# Altium PCB shkb_lite.PcbDoc (part 1 of 2)
Units mm, origin at the board's own origin, x right, y up, seen from the top; angles counter-clockwise.
Board outline 141.5 x 36 mm, 2 copper layers (Top Layer, Bottom Layer), stack 1.57 mm thick; 74 components, 53 nets, 368 pads, 293 vias.
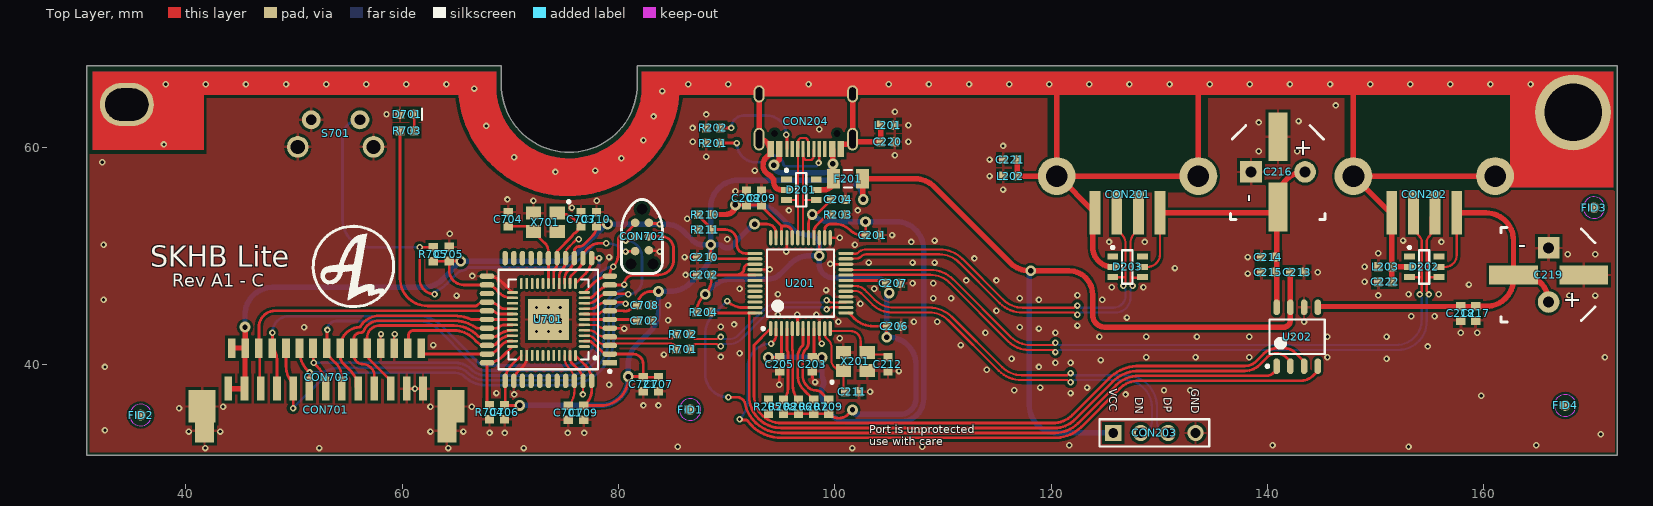
[diagram p0: Top Layer view]
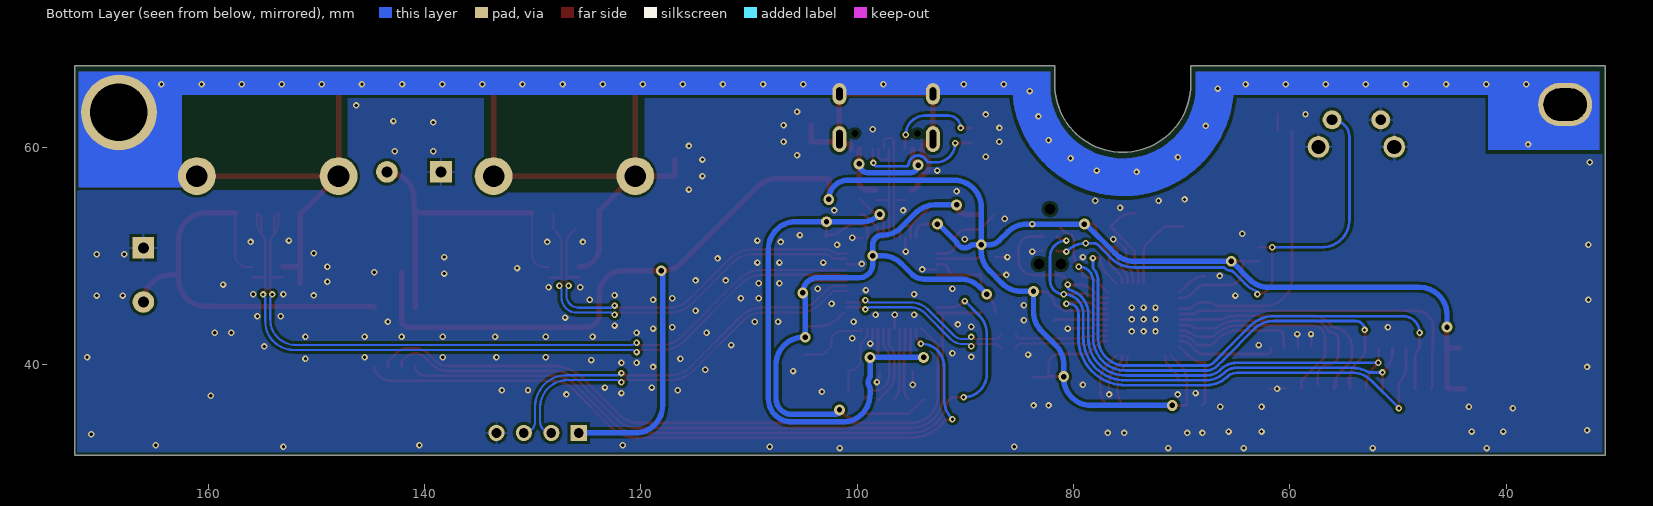
[diagram p1: Bottom Layer view, seen from below]

## Layer stack, top to bottom
Top Solder: solder mask 0.0102, Solder Resist, Dk 3.5
Top Layer: signal copper 0.0356
Dielectric 1: core 1.4986, Core-043, Dk 4.3
Bottom Layer: signal copper 0.0356
Bottom Solder: solder mask 0.0102, Solder Resist, Dk 3.5

## Board outline
30.843,31.602 30.843,67.602 69.143,67.602 69.143,65.902 ccw(c75.443,65.902) 75.443,59.602 ccw(c75.443,65.902) 81.743,65.902 81.743,67.602 172.344,67.602 172.344,31.602

## Design rules (kind name [scope] priority, off if disabled: settings)
BoardOutlineClearance [All] p1: gap=0.254 ignorepadtopadclearanceinfootprint=FALSE except(0: Arc-SplitContinuation Track-SplitContinuation SMDPad-SplitContinuation THPad-SplitContinuation Via-SplitContinuation Fill-SplitContinuation Poly-SplitContinuation Region-SplitContinuation Text-SplitContinuation)
Clearance [All] p1: gap=0.254 ignorepadtopadclearanceinfootprint=FALSE except(0: Arc-Hole Track-Hole SMDPad-Hole THPad-Hole Via-Hole Fill-Hole Poly-Hole Region-Hole Text-Hole; 0.2: Arc-Arc Arc-Track Arc-SMDPad Track-Track Track-SMDPad SMDPad-SMDPad)
DiffPairsRouting [All] p1: maxlimit=0.254 minlimit=0.254 mostfreqgap=0.254 toplayer_minwidth=0.2 toplayer_maxwidth=0.381 toplayer_prefwidth=0.381 bottomlayer_minwidth=0.2 bottomlayer_maxwidth=0.381 bottomlayer_prefwidth=0.381 maxuncoupledlength=12.7
PlaneConnect [All] p1: pad.planeconnectstyle=Relief pad.reliefexpansion=0.508 pad.reliefentries=4 pad.reliefconductorwidth=0.254 pad.reliefairgap=0.254 via.planeconnectstyle=Direct via.reliefexpansion=0.508 via.reliefentries=4 via.reliefconductorwidth=0.254 via.reliefairgap=0.254
PolygonConnect [All] p1: connectstyle=Relief reliefconductorwidth=0.254 reliefentries=4 polygonreliefangle="90 Angle" airgapwidth=0.254
RoutingVias [All] p1: holewidth=0.711 width=1.27 viastyle="Through Hole" minholewidth=0.3 minwidth=0.6 maxholewidth=0.711 maxwidth=1.27
SolderMaskExpansion [All] p1: expansion=0.102 istentingtop=FALSE
Width [All] p1: maxlimit=0.5 minlimit=0.2 preferedwidth=0.254
28 further rules are at their usual default settings.

## Classes and differential pairs
component class Designator: C201 C202 C203 C204 C205 C206 C207 C208 C209 C210 C211 C212 C213 C214 C215 C216 C217 C218 C219 C220 C221 C222 CON201 CON202 CON203 CON204 D201 D202 D203 F201 FID1 FID2 FID3 FID4 L201 L202 L203 R201 R202 R203 R204 R205 R206 R207 R208 R209 R210 R211 U201 U202 X201
differential pair D4: +D4_P -D4_N
differential pair D3: +D3_P -D3_N
differential pair D2: +D2_P -D2_N
differential pair D1: +D1_P -D1_N
differential pair D: +D_P -D_N
differential pair MCU_D_PRE: +MCU_D_PRE_P -MCU_D_PRE_N

## Components (designator, comment, footprint, x,y, rotation, side; value= is the part's Value field where it differs from the comment)
C201 "" C0603[1608] 103.505,51.943 r180 top value=10uF
C202 "" C0603[1608] 87.925,48.26 r0 top value=10uF
C203 "" C0603[1608] 97.917,40.005 r90 top value=0.1uF
C204 "" C0603[1608] 100.33,55.245 r180 top value=0.1uF
C205 "" C0603[1608] 94.91,40.005 r90 top value=0.1uF
C206 "" C0603[1608] 105.48,43.517 r180 top value=0.1uF
C207 "" C0603[1608] 105.41,47.498 r180 top value=0.1uF
C208 "" C0603[1608] 91.821,55.372 r270 top value=0.1uF
C209 "" C0603[1608] 93.218,55.372 r270 top value=0.1uF
C210 "" C0603[1608] 87.925,49.911 r0 top value=1uF
C211 "" C0603[1608] 101.6,37.465 r180 top value=30pF
C212 "" C0603[1608] 104.902,40.005 r90 top value=30pF
C213 "" C0603[1608] 142.748,48.514 r180 top value=0.1uF
C214 "" C0603[1608] 140.081,49.911 r0 top value=0.1uF
C215 "" C0603[1608] 140.081,48.514 r0 top value=10uF
C216 "" "C_9L_9M + THT" 140.97,57.785 r270 top value=120-150uF
C217 "" C0603[1608] 159.258,44.704 r90 top value=0.1uF
C218 "" C0603[1608] 157.861,44.704 r90 top value=10uF
C219 "" "C_9L_9M + THT" 165.989,48.26 r180 top value=120-150uF
C220 "" C0603[1608] 104.902,60.579 r180 top value=0.1uF
C221 "" C0603[1608] 116.205,58.928 r0 top value=0.1uF
C222 "" C0603[1608] 150.876,47.625 r0 top value=0.1uF
C701 "" C0603[1608] 75.357,35.53 r270 top value=0.1uF
C702 "" C0603[1608] 82.405,44.048 r0 top value=1uF
C703 "" C0603[1608] 76.538,53.421 r270 top value=18pF
C704 "" C0603[1608] 69.807,53.421 r270 top value=18pF
C705 "" C0603[1608] 64.346,50.195 r270 top value=0.1uF
C706 "" C0603[1608] 69.469,35.56 r90 top value=0.1uF
C707 "" C0603[1608] 83.701,38.156 r90 top value=0.1uF
C708 "" C0603[1608] 82.405,45.471 r180 top value=0.1uF
C709 "" C0603[1608] 76.792,35.53 r90 top value=1uF
C710 "" C0603[1608] 77.96,53.421 r270 top value=0.1uF
C721 "" C0603[1608] 82.278,38.156 r90 top value=0.1uF
CON201 "Generic USB-A 2.0" "JING 903-231A2031S10100" 127.058,57.4 r180 top locked
CON202 "Generic USB-A 2.0" "JING 903-231A2031S10100" 154.493,57.4 r180 top locked
CON203 "Header 4" HDR1X4 125.73,33.655 r0 top
CON204 "TYPE-C-31-M-12" TYPE-C-31-M-12 97.315,59.9 r180 top
CON701 "HHKB-board connector" "JST S13B-ZR-SM4A-TF(LF)(SN)" 61.922,37.749 r180 top locked
CON702 "TC2030-IDC" TC2030-IDC-NL 82.169,51.816 r270 top
CON703 "HHKB-board connector JP" DF14A-15P-1.25H 53.005,36.102 r180 top locked
D201 "SRV05" SOT-23-6 96.901,56.134 r0 top
D202 "SRV05" SOT-23-6 154.493,49 r0 top
D203 "SRV05" SOT-23-6 127.058,49 r0 top
D701 "LED1" LED0603[1608] 60.452,63.119 r0 top
F201 "Fuse Thermal" C1206[3216] 101.219,57.15 r180 top
FID1 "Plug" Fiducial_Nordic 86.614,35.814 r90 top
FID2 "Plug" Fiducial_Nordic 35.814,35.306 r90 top
FID3 "Plug" Fiducial_Nordic 170.18,54.483 r90 top
FID4 "Plug" Fiducial_Nordic 167.513,36.195 r90 top
L201 "Inductor" L0603[1608] 104.902,62.103 r180 top value="220 @ 100MHz, 2A"
L202 "Inductor" L0603[1608] 116.205,57.404 r0 top value="220 @ 100MHz, 2A"
L203 "Inductor" L0603[1608] 150.876,49.022 r0 top value="220 @ 100MHz, 2A"
R201 "Res1" R0603[1608] 88.75,60.452 r180 top value=5k1
R202 "Res1" R0603[1608] 88.75,61.849 r180 top value=5k1
R203 "" R0603[1608] 100.33,53.848 r180 top value=2.7k
R204 "" R0603[1608] 87.884,44.831 r180 top value=10k
R205 "" R0603[1608] 93.853,36.068 r90 top value=10k
R206 "" R0603[1608] 96.647,36.068 r270 top value=10k
R207 "" R0603[1608] 98.044,36.068 r270 top value=10k
R208 "" R0603[1608] 95.25,36.068 r270 top value=10k
R209 "" R0603[1608] 99.441,36.068 r270 top value=10k
R210 "" R0603[1608] 88.011,53.848 r180 top value=DNM
R211 "" R0603[1608] 88.011,52.451 r0 top value=DNM
R701 "" R0603[1608] 85.979,41.402 r180 top value=22R
R702 "" R0603[1608] 85.979,42.799 r180 top value=22R
R703 "" R0603[1608] 60.452,61.595 r0 top value=1K
R704 "" R0603[1608] 68.072,35.56 r90 top value=10K
R705 "" R0603[1608] 62.873,50.17 r270 top value=10K
S701 "SW-PB" "WURTH 431256038736" 53.843,62.602 r180 top locked
U201 "FE1.1" "FE1.1 LQFP48" 96.815,47.498 r90 top
U202 "MIC2026-2" SOIC-8 142.748,42.545 r90 top
U701 "ATMEGA32U4" ATMEGA32U4-COMBO 73.515,44.142 r180 top locked
X201 "XTAL" XTAL-3225 101.895,40.259 r0 top value=12MHz
X701 "XTAL" XTAL-3225 73.236,53.116 r180 top

## Footprints (in the part's own frame and the unit in brackets; to place one, negate y for a bottom-side part, rotate by r counter-clockwise, add the part's x,y. Pads: shape width x height; smd on the part's side, far side on the other; paste and mask are expansions set on the pad)
ATMEGA32U4-COMBO [mm] "QFP, 44-Leads, Body 9,95x9,95mm, Pitch 0,80mm, IPC Medium Density"
  rect 1.35x0.5 smd: 1(-5.675,4)
  oval 1.05x0.25 smd: 1(-3.325,2.5) 2(-3.325,2) 3(-3.325,1.5) 4(-3.325,1) 5(-3.325,0.5) 6(-3.325,0) 7(-3.325,-0.5) 8(-3.325,-1) 9(-3.325,-1.5) 10(-3.325,-2) 11(-3.325,-2.5) 23(3.325,-2.5) 24(3.325,-2) 25(3.325,-1.5) 26(3.325,-1) 27(3.325,-0.5) 28(3.325,0) 29(3.325,0.5) 30(3.325,1) 31(3.325,1.5) 32(3.325,2) 33(3.325,2.5)
  oval 1.35x0.5 smd: 2(-5.675,3.2) 3(-5.675,2.4) 4(-5.675,1.6) 5(-5.675,0.8) 6(-5.675,0) 7(-5.675,-0.8) 8(-5.675,-1.6) 9(-5.675,-2.4) 10(-5.675,-3.2) 11(-5.675,-4) 23(5.675,-4) 24(5.675,-3.2) 25(5.675,-2.4) 26(5.675,-1.6) 27(5.675,-0.8) 28(5.675,0) 29(5.675,0.8) 30(5.675,1.6) 31(5.675,2.4) 32(5.675,3.2) 33(5.675,4)
  oval 0.5x1.35 smd: 12(-4,-5.675) 13(-3.2,-5.675) 14(-2.4,-5.675) 15(-1.6,-5.675) 16(-0.8,-5.675) 17(0,-5.675) 18(0.8,-5.675) 19(1.6,-5.675) 20(2.4,-5.675) 21(3.2,-5.675) 22(4,-5.675) 34(4,5.675) 35(3.2,5.675) 36(2.4,5.675) 37(1.6,5.675) 38(0.8,5.675) 39(0,5.675) 40(-0.8,5.675) 41(-1.6,5.675) 42(-2.4,5.675) 43(-3.2,5.675) 44(-4,5.675)
  oval 0.25x1.05 smd: 12(-2.5,-3.325) 13(-2,-3.325) 14(-1.5,-3.325) 15(-1,-3.325) 16(-0.5,-3.325) 17(0,-3.325) 18(0.5,-3.325) 19(1,-3.325) 20(1.5,-3.325) 21(2,-3.325) 22(2.5,-3.325) 34(2.5,3.325) 35(2,3.325) 36(1.5,3.325) 37(1,3.325) 38(0.5,3.325) 39(0,3.325) 40(-0.5,3.325) 41(-1,3.325) 42(-1.5,3.325) 43(-2,3.325) 44(-2.5,3.325)
  rect 3.81x3.81 smd paste-1000: 43(0,0)
  silkscreen extent -5.8,-4.6 4.6,4.92, body extent -3.6,-3.6 3.6,3.6, height 1
C0603[1608] [mm] "Chip Resistor, 2-Leads, Body 1,57x0,80mm, IPC Medium Density"
  rect 0.8x0.85 smd: 1(-0.65,0) 2(0.65,0)
  body extent -0.83,-0.43 0.82,0.43, height 0.5
C1206[3216] [mm]
  rect 1.2x1.8 smd: 1(-1.35,0) 2(1.35,0)
  silkscreen extent -0.35,-0.8 0.35,0.8, body extent -1.6,-0.9 1.6,0.9, height 1.2
"C_9L_9M + THT" [mm] "Size 9L and 9M Aluminium capacitor"
  round 2 hole 1 mask+0.102: 1(0,2.5)
  rect 4.5x1.75 smd: 1(3.25,0) 2(-3.25,0)
  rect 2x2 hole 1 mask+0.102: 2(0,-2.5)
  silkscreen extent -4.29,-4.39 4.39,4.34, body extent -4.8,-4.26 4.8,4.24, height 6.5
DF14A-15P-1.25H [mm]
  rect 0.7x1.8 smd: 1(8.75,-5.4) 2(7.5,-5.4) 3(6.25,-5.4) 4(5,-5.4) 5(3.75,-5.4) 6(2.5,-5.4) 7(1.25,-5.4) 8(0,-5.4) 9(-1.25,-5.4) 10(-2.5,-5.4) 11(-3.75,-5.4) 12(-5,-5.4) 13(-6.25,-5.4) 14(-7.5,-5.4) 15(-8.75,-5.4)
  rect 2.5x3 smd: 16(-11.5,0) 16(11.5,0)
"FE1.1 LQFP48" [mm] "TSQFP, 48-Leads, Body 7.00x7.00mm, Pitch 0.50mm, IPC Medium Density"
  oval 1.4x0.3 smd: 1(-4.2,2.75) 2(-4.2,2.25) 3(-4.2,1.75) 4(-4.2,1.25) 5(-4.2,0.75) 6(-4.2,0.25) 7(-4.2,-0.25) 8(-4.2,-0.75) 9(-4.2,-1.25) 10(-4.2,-1.75) 11(-4.2,-2.25) 12(-4.2,-2.75) 25(4.2,-2.75) 26(4.2,-2.25) 27(4.2,-1.75) 28(4.2,-1.25) 29(4.2,-0.75) 30(4.2,-0.25) 31(4.2,0.25) 32(4.2,0.75) 33(4.2,1.25) 34(4.2,1.75) 35(4.2,2.25) 36(4.2,2.75)
  oval 0.3x1.4 smd: 13(-2.75,-4.2) 14(-2.25,-4.2) 15(-1.75,-4.2) 16(-1.25,-4.2) 17(-0.75,-4.2) 18(-0.25,-4.2) 19(0.25,-4.2) 20(0.75,-4.2) 21(1.25,-4.2) 22(1.75,-4.2) 23(2.25,-4.2) 24(2.75,-4.2) 37(2.75,4.2) 38(2.25,4.2) 39(1.75,4.2) 40(1.25,4.2) 41(0.75,4.2) 42(0.25,4.2) 43(-0.25,4.2) 44(-0.75,4.2) 45(-1.25,4.2) 46(-1.75,4.2) 47(-2.25,4.2) 48(-2.75,4.2)
  silkscreen extent -4.32,-3.1 3.1,3.57, body extent -4.5,-4.5 4.5,4.5, height 1.5
Fiducial_Nordic [mm]
  round 1 smd paste+0 mask+0.5: 0(0,0)
  Top Layer keep-out circle w0.01: c0,0 r1
HDR1X4 [mm] "Connector; Header; 4 Position"
  rect 1.5x1.5 hole 0.9: 1(0,0)
  round 1.5 hole 0.9: 2(2.54,0) 3(5.08,0) 4(7.62,0)
  silkscreen extent -1.27,-1.27 8.89,1.27
"JING 903-231A2031S10100" [mm] "C42646"
  rect 1x4 smd: 1(-3,3.4) 2(-1,3.4) 3(1,3.4) 4(3,3.4)
  round 3.5 hole 2: 5(-6.55,0) 5(6.55,0)
"JST S13B-ZR-SM4A-TF(LF)(SN)" [mm]
  rect 0.7x2.2 smd: 1(0,0) 2(1.5,0) 3(3,0) 4(4.5,0) 5(6,0) 6(7.5,0) 7(9,0) 8(10.5,0) 9(12,0) 10(13.5,0) 11(15,0) 12(16.5,0) 13(18,0)
  rect 1.75x2.2 smd: 14(-2.2,3.9) 14(20.2,3.9)
  body extent -2.23,-0.53 20.27,5.97, height 3.7
L0603[1608] [mm] "Chip Resistor, 2-Leads, Body 1,57x0,80mm, IPC Medium Density"
  rect 0.8x0.85 smd: 1(-0.65,0) 2(0.65,0)
  body extent -0.83,-0.43 0.82,0.43, height 0.5
LED0603[1608] [mm] "Chip Resistor, 2-Leads, Body 1,57x0,80mm, IPC Medium Density"
  rect 0.8x0.85 smd: 1(-0.65,0) 2(0.65,0)
  silkscreen extent 1.37,-0.51 1.37,0.53, body extent -0.77,-0.4 0.83,0.4, height 0.8
R0603[1608] [mm] "Chip Resistor, 2-Leads, Body 1,57x0,80mm, IPC Medium Density"
  rect 0.8x0.85 smd: 1(-0.65,0) 2(0.65,0)
  body extent -0.83,-0.43 0.82,0.43, height 0.5
SOIC-8 [mm] "Based on AT24C256C datasheet"
  oval 1.45x0.6 smd: 1(-2.725,1.905) 2(-2.725,0.635) 3(-2.725,-0.635) 4(-2.725,-1.905) 5(2.725,-1.905) 6(2.725,-0.635) 7(2.725,0.635) 8(2.725,1.905)
  silkscreen extent -2.85,-2.55 1.6,2.88, body extent -3,-2.55 3,2.55, height 1.75
SOT-23-6 [mm]
  rect 1x0.55 smd: 1(-1.375,0.95) 2(-1.375,0) 3(-1.375,-0.95) 4(1.375,-0.95) 5(1.375,0) 6(1.375,0.95)
  silkscreen extent -1.5,-1.55 0.46,1.92, body extent -1.37,-1.44 1.47,1.49, height 1.05
TC2030-IDC-NL [mm] "Tag-Connect 6-Pin with No Legs (PN# TC2030-IDC-NL)"
  round 0.9 hole 0.995 unplated: 0(-2.54,0) 0(2.54,1.016) 0(2.54,-1.016)
  round 0.79 smd paste-0.39: 1(-1.27,-0.635) 2(-1.27,0.635) 3(0,-0.635) 4(0,0.635) 5(1.35,-0.635) 6(1.27,0.635)
  silkscreen extent -3.43,-1.9 3.43,1.9
TYPE-C-31-M-12 [mm]
  rect 0.6x1.45 smd: A1B12(-3.25,0) A4B9(-2.45,0) B1A12(3.25,0) B4A9(2.45,0)
  rect 0.3x1.45 smd: A5(-1.25,0) A6(-0.25,0) A7(0.25,0) A8(1.25,0) B5(1.75,0) B6(0.75,0) B7(-0.75,0) B8(-1.75,0)
  oval 1x2.1 / inner oval 1x2.1 / far side oval 1.3x2.4 hole 0.6 slot 1.7 at 90 deg: S1(-4.32,-0.915) S1(4.32,-0.915)
  oval 1x1.6 / inner oval 1x1.6 / far side oval 1.3x2 hole 0.6 slot 1.2 at 90 deg: S1(-4.32,-5.095) S1(4.32,-5.095)
  round 0 hole 0.65 unplated: ""(-2.89,-1.445) ""(2.89,-1.445)
  body extent -4.47,-7.72 4.47,0.18, height 3.21
"WURTH 431256038736" [mm]
  round 1.75 hole 1 mask+0.102: 1(-2.25,0) 2(2.25,0)
  round 2 hole 1.3 mask+0.102: 3(-3.5,2.5) 3(3.5,2.5)
  body extent -4.2,-3.85 4.2,4, height 7.2
XTAL-3225 [mm]
  rect 1.4x1.2 smd: 1(-1.1,-0.85) 2(1.1,-0.85) 3(1.1,0.85) 4(-1.1,0.85)
  silkscreen extent -2.28,-2.03 -2.03,-1.78, body extent -1.6,-1.25 1.6,1.25, height 0.65

## Part data
C201 C202 C215 C218: library part Cap, "Capacitor", JLC=BASIC, LCSC MFG="Samsung Electro-Mechanics", LCSC Part #=C19702, MRF.Part=CL10A106KP8NNNC, Version="0603 imperial"
C203 C204 C205 C206 C207 C208 C209 C213 C214 C217 C220 C221 C222 C701 C705 C706 C707 C708 C710 C721: library part Cap, "Capacitor", JLC=BASIC, LCSC MFG=YAGEO, LCSC Part #=C14663, MFG=KEMET, MFGPN=C0603C104M5RACTU, MRF.Part=CC0603KRX7R9BB104, Version="0603 imperial"
C210 C702 C709: library part Cap, "Capacitor", JLC=BASIC, LCSC MFG="Samsung Electro-Mechanics", LCSC Part #=C15849, MFG=KEMET, MFGPN=C0603C105K4RACTU, MRF.Part=CL10A105KB8NNNC, Version="0603 imperial"
C211 C212: library part Cap, "Capacitor", JLC=BASIC, LCSC MFG="Samsung Electro-Mechanics", LCSC Part #=C22397, MRF.Part=CL10C300JB8NNNC, Version="0603 imperial"
C216 C219: library part Cap, "Capacitor", JLC=EXTENDED, LCSC MFG=Lelon, LCSC Part #=C250088, MFG="Würth Elektronik", MFGPN=865080349011, MRF.Part=OVZ121M1CTR-0807, Version="SMD - 9L or 9M"
C703 C704: library part Cap, "Capacitor", JLC=BASIC, LCSC MFG="Samsung Electro-Mechanics", LCSC Part #=C1647, MFG=KEMET, MFGPN=C0603C180J5GACAUTO, MRF.Part=CL10C180JB8NNNC, Version="0603 imperial"
CON203: "Header, 4-Pin"
CON204: LCSC MFG="Korean Hroparts Elec", LCSC Part #=C165948, MFG="Korean Hroparts Elec", MFGPN=TYPE-C-31-M-12, MRF.Part=TYPE-C-31-M-12
CON701: library part "Header 14", JLC=NONE, LCSC MFG="JST Sales America", LCSC Part #=C265326, MFG="JST Sales America Inc", MFGPN=S13B-ZR-SM4A-TF(LF)(SN), MRF.Part=S13B-ZR-SM4A-TF(LF)(SN)
CON702: library part "Header 3X2", "Header, 3-Pin, Dual row", JLC=DNP
CON703: library part DF14A-15P-1.25H, JLC=NONE, LCSC MFG=HRS(Hirose), LCSC Part #=C597889, MFG="Hirose Electric Co Ltd", MFGPN=DF14A-15P-1.25H(26), MRF.Part=DF14A-15P-1.25H(26)
D201 D202 D203: JLC=BASIC, LCSC MFG="ProTek Devices", LCSC Part #=C85364, MRF.Part=SRV05-4-P-T7
D701: "Typical RED GaAs LED", JLC=BASIC, LCSC MFG="Hubei KENTO Elec", LCSC Part #=C2286, MRF.Part=KT-0603R
F201: "Thermal Fuse", LCSC MFG="Shenzhen JDT Fuse", LCSC Part #=C135338, MFG="Bel Fuse Inc.", MFGPN=0ZCJ0050FF2G, MRF.Part=ASMD1206-050
FID1 FID2 FID3 FID4: JLC=DNP
L201 L202 L203: JLC=EXTENDED, LCSC MFG="Murata Electronics", LCSC Part #=C85832, MFG="Murata Electronics North America", MFGPN=BLM18KG221SN1D, MRF.Part=BLM18KG331SN1D, Version="0603 imperial"
R201 R202: "Resistor", JLC=BASIC, LCSC MFG="Uniroyal Elec", LCSC Part #=C23186, MFG="Panasonic Electronic Components", MFGPN=ERJ-3EKF5101V, MRF.Part=0603WAF5101T5E, Version="0603 imperial"
R203: library part Res1, "Resistor", JLC=BASIC, LCSC MFG="UNI-ROYAL(Uniroyal Elec)", LCSC Part #=C13167, MRF.Part=0603WAF2701T5E, Version="0603 imperial"
R204 R205 R206 R207 R208 R209 R704 R705: library part Res1, "Resistor", JLC=BASIC, LCSC MFG="Uniroyal Elec", LCSC Part #=C25804, MFG="Vishay Dale", MFGPN=RCA060310K0FKEA, MRF.Part=0603WAF1002T5E, Version="0603 imperial"
R210 R211: library part Res1, "Resistor", JLC=BASIC, Version="0603 imperial"
R701 R702: library part Res1, "Resistor", JLC=BASIC, LCSC MFG="Uniroyal Elec", LCSC Part #=C23345, MFG="Vishay Dale", MFGPN=CRCW060322R0FKEAC, MRF.Part="0603WAF220JT5E  0603WAF220JT5E", Version="0603 imperial"
R703: library part Res1, "Resistor", JLC=BASIC, LCSC MFG="Uniroyal Elec", LCSC Part #=C21190, MFG="Vishay Dale", MFGPN=0603WAF1001T5E, MRF.Part=0603WAF1001T5E, Version="0603 imperial"
S701: "Switch", JLC=NONE, LCSC MFG="Korean Hroparts Elec", LCSC Part #=C127680, MFG="Wurth Electronics Inc", MFGPN=431256038736, MRF.Part=K2-1102AQ-C4CW-01
U701: JLC=EXTENDED, LCSC MFG="Microchip Tech", LCSC Part #=C45874, MFG="Microchip Technology", MFGPN=ATMEGA32U4-MUR, MRF.Part=ATMEGA32U4-MUR
X201: "Crystal Oscillator", JLC=BASIC, LCSC MFG="Yangxing Tech", LCSC Part #=C9002, MRF.Part=X322512MSB4SI
X701: "Crystal Oscillator", JLC=BASIC, LCSC MFG="Yangxing Tech", LCSC Part #=C13738, MRF.Part=X322516MLB4SI

## Free pads (board coordinates)
  oval 5x4 hole 3 slot 4 at 0 deg paste-1: ""(34.544,64.008)
  round 7 hole 5.3: ""(168.251,63.288)

## Via types
v1: diameter 0.6, hole 0.3, Top Layer to Bottom Layer, tented both sides, 262 vias
v2: diameter 1, hole 0.5, Top Layer to Bottom Layer, tented both sides, 22 vias
v3: diameter 0.6, hole 0.3, Top Layer to Bottom Layer, 9 vias

## Nets (pads, with @x,y where several pads share a name; then routed paths per layer and width w, separated by ;. In a path a pad name is that pad's centre, name@x,y a point inside that pad or via, vN(x,y) a via of type N, cw(c..) or ccw(c..) an arc to the next point about the centre after c; other vN are vias at no path point)
D1_N: CON201.2 D203.4 U201.23 | length 38.8
  Top Layer w0.203: U201.23@101.015,49.748 cw(c101.06,49.703) 101.06,49.767 101.652,49.767 101.655,49.769 101.952,49.769 ccw(c101.952,50.445) 102.43,49.967 cw(c102.907,49.49) 102.907,50.165 109.68,50.165 cw(c109.68,47.625) 111.476,49.421 115.245,45.653 ccw(c117.363,47.771) 115.248,45.65 ccw(c117.363,47.771) 117.359,44.775 ccw(c117.363,47.771) 117.363,44.775 122.122,44.775 122.321,44.577 v1(122.428,44.577) ; v1(127.529,47.251) cw(c127.529,47.45) 127.33,47.45 127.33,48.006 ; CON201.2@128.058,54 128.058,52.5 127.784,52.226 ccw(c128.874,51.133) 127.33,51.133 127.33,51.13 127.33,48.006 ; D203.4@128.433,48.05 cw(c128.389,48.05) 128.389,48.006 127.33,48.006
  Bottom Layer w0.203: v1(122.428,44.577) 122.535,44.577 122.734,44.775 125.94,44.775 ccw(c125.94,46.166) 127.33,46.166 127.33,46.946 127.529,47.144 v1(127.529,47.251)
D1_P: CON201.3 D203.3 U201.24 | length 36.6
  Top Layer w0.203: U201.24@101.015,50.248 ccw(c101.06,50.293) 101.06,50.229 101.652,50.229 101.655,50.227 101.95,50.227 ccw(c101.95,50.45) 102.108,50.292 cw(c102.905,49.494) 102.905,50.622 109.682,50.622 cw(c109.682,47.628) 111.799,49.745 115.567,45.977 ccw(c117.364,47.773) 117.364,45.233 122.122,45.233 122.321,45.431 v1(122.428,45.431) ; D203.3@125.683,48.05 126.829,48.05 cw(c126.829,48.006) 126.873,48.006 ; CON201.3@126.058,52.5 126.477,52.081 126.478,52.08 cw(c125.529,51.128) 126.873,51.128 126.873,48.006 ; v1(126.675,47.251) ccw(c126.675,47.45) 126.873,47.45 126.873,48.006
  Bottom Layer w0.203: v1(122.428,45.431) 122.535,45.431 122.734,45.233 125.751,45.233 ccw(c125.751,46.355) 126.873,46.355 126.873,46.946 126.675,47.144 v1(126.675,47.251)
D2_N: CON202.2 D202.4 U201.20 | length 71.8
  Top Layer w0.203: U201.20@101.015,48.248 101.034,48.267 101.652,48.267 101.655,48.269 108.832,48.269 cw(c108.832,45.729) 110.628,47.525 116.04,42.113 ; 116.041,42.112 ccw(c117.94,44.012) 117.94,41.326 120.198,41.326 v1(120.396,41.127) ; v1(154.92,46.454) 154.92,46.561 154.722,46.759 154.722,48.006 ; D202.4@155.868,48.05 154.766,48.05 ccw(c154.766,48.006) 154.722,48.006 ; 154.722,48.006 154.722,51.334 cw(c155.358,51.334) 154.908,51.784 ; 154.908,51.784 ccw(c153.496,53.196) 154.909,51.785 ; 154.908,51.784 154.909,51.785 ; 154.909,51.785 ccw(c153.496,53.196) 155.095,51.999 ; 155.095,51.999 ccw(c153.496,53.196) 155.493,53.196 CON202.2@155.493,54 155.095,53.602 155.095,51.999
  Bottom Layer w0.203: v1(120.396,41.127) 120.503,41.127 120.702,41.326 152.081,41.326 ccw(c152.081,43.966) 154.722,43.966 154.722,46.148 154.92,46.346 v1(154.92,46.454)
D2_P: CON202.3 D202.3 U201.21 | length 71
  Top Layer w0.203: U201.21@101.015,48.748 101.034,48.729 101.652,48.729 101.655,48.727 108.833,48.727 cw(c108.833,45.733) 110.95,47.85 116.273,42.527 ccw(c118.069,44.323) 118.069,41.783 120.198,41.783 v1(120.396,41.981) ; D202.3@153.118,48.05 154.22,48.05 cw(c154.22,48.006) 154.264,48.006 ; v1(154.066,46.454) 154.066,46.561 154.264,46.759 154.264,48.006 ; CON202.3@153.891,52.004 ccw(c155.49,53.201) 154.077,51.79 ; CON202.3@153.891,52.004 cw(c155.49,53.201) 153.493,53.201 CON202.3@153.493,54 153.891,53.602 CON202.3@153.891,52.004 ; 154.077,51.79 ccw(c155.49,53.201) 154.078,51.789 ; 154.077,51.79 154.078,51.789 ; 154.078,51.789 cw(c153.628,51.339) 154.264,51.339 154.264,48.006
  Bottom Layer w0.203: v1(120.396,41.981) 120.503,41.981 120.702,41.783 151.892,41.783 ccw(c151.892,44.155) 154.264,44.155 154.264,46.148 154.066,46.346 v1(154.066,46.454)
D3_N: CON203.2 U201.17 | length 36.1
  Top Layer w0.2: U201.17@101.015,46.748 101.034,46.767 101.655,46.767 101.659,46.771 101.947,46.771 cw(c101.947,46.075) 102.438,46.568 103.468,45.538 ccw(c105.264,47.334) 105.264,44.794 108.713,44.794 cw(c108.713,42.254) 110.509,44.05 115.148,39.411 ccw(c117.263,41.527) 115.151,39.408 ccw(c117.263,41.527) 117.259,38.535 ccw(c117.263,41.527) 117.263,38.535 121.485,38.535 121.685,38.335 v1(121.793,38.335)
  Bottom Layer w0.2: v1@121.793,38.535 v1(121.793,38.335) 121.901,38.335 122.101,38.535 126.773,38.535 cw(c126.773,35.995) 129.313,35.995 129.313,34.698 cw(c128.27,34.698) CON203.2@128.27,33.655
D3_P: CON203.3 U201.18 | length 36.7
  Top Layer w0.2: U201.18@101.015,47.248 101.034,47.229 101.655,47.229 101.659,47.225 102.041,47.225 cw(c102.041,46.71) 102.218,47.194 ccw(c102.285,47.382) 102.234,47.189 102.244,47.186 cw(c101.947,46.075) 102.759,46.889 cw(c101.947,46.075) 102.761,46.887 102.955,46.694 103.677,45.971 ccw(c105.422,47.716) 105.422,45.248 108.714,45.248 cw(c108.714,42.258) 110.829,44.372 115.468,39.733 ccw(c117.264,41.529) 117.264,38.989 121.485,38.989 121.685,39.189 v1(121.793,39.189)
  Bottom Layer w0.2: v1@121.722,39.189 v1(121.793,39.189) 121.901,39.189 122.101,38.989 126.88,38.989 cw(c126.88,36.102) 129.767,36.102 129.767,34.698 ccw(c130.81,34.698) CON203.3@130.81,33.655
D4_N: R701.1 U201.14 | length 16.1
  Top Layer w0.2: R701.1@86.629,41.402 86.91,41.683 ccw(c86.863,41.729) 86.929,41.729 cw(c86.995,41.729) 86.948,41.776 cw(c87.185,41.539) 87.185,41.874 88.966,41.874 cw(c88.966,41.452) 89.264,41.75 ccw(c89.449,41.935) v1(89.449,41.674) ; v1(99.228,45.071) cw(c99.711,44.588) 99.711,45.271 100.371,45.271 100.375,45.267 100.969,45.267 cw(c100.969,45.202) U201.14@101.015,45.248
  Bottom Layer w0.2: v1(89.449,41.674) 89.557,41.674 89.757,41.874 90.234,41.874 ccw(c90.234,43.47) 91.363,42.341 93.762,44.74 cw(c95.044,43.458) 93.763,44.741 cw(c95.044,43.458) 95.044,45.271 98.92,45.271 99.12,45.071 v1(99.228,45.071)
D4_P: R702.1 U201.15 | length 16.1
  Top Layer w0.2: R702.1@86.629,42.799 86.91,42.518 cw(c86.863,42.472) 86.929,42.472 ccw(c86.995,42.472) 86.948,42.425 ccw(c87.185,42.662) 87.185,42.327 88.966,42.327 ccw(c88.966,42.749) 89.264,42.451 cw(c89.449,42.266) v1(89.449,42.527) ; v1(99.228,45.925) ccw(c99.711,46.408) 99.711,45.725 100.371,45.725 100.375,45.729 100.969,45.729 ccw(c100.969,45.794) U201.15@101.015,45.748
  Bottom Layer w0.2: v1(89.449,42.527) 89.557,42.527 89.757,42.327 90.232,42.327 ccw(c90.232,43.474) 91.043,42.663 ; 91.043,42.663 93.442,45.062 cw(c95.043,43.461) 93.445,45.065 cw(c95.043,43.461) 95.043,45.725 98.92,45.725 99.12,45.925 v1(99.228,45.925)
D_N: CON204.A7 CON204.B7 D201.4 U201.30 | length 11.5
  Top Layer w0.2: U201.30@97.042,52.342 97.042,55.118 ; CON204.B7@98.065,59.9 98.015,59.84 98.015,59.175 cw(c97.715,59.175) 97.715,58.875 97.415,58.875 cw(c97.415,59.175) 97.115,59.175 97.115,59.275 97.042,59.877 97.042,55.118 ; D201.4@98.276,55.184 97.108,55.184 97.042,55.118
D_P: CON204.A6 CON204.B6 D201.3 U201.31 | length 12
  Top Layer w0.2: D201.3@95.526,55.184 96.522,55.184 96.588,55.118 ; U201.31@96.565,51.698 96.584,51.717 U201.31@96.584,52.338 ; U201.31@96.588,52.342 96.588,55.118 ; CON204.A6@97.565,59.9 97.515,60.525 97.515,60.625 ccw(c97.215,60.625) 97.215,60.925 96.915,60.925 ccw(c96.915,60.625) 96.615,60.625 96.615,60.062 CON204.B6@96.565,59.9 96.588,59.877 96.588,55.118
GND: C201.1 C202.1 C203.1 C204.1 C205.1 C206.1 C207.1 C208.1 C209.1 C210.1 C211.1 C212.1 C213.1 C214.1 C215.1 C216.2 C217.1 C218.1 C219.2 C220.1 C221.1 C222.1 C701.2 C702.2 C703.1 C704.1 C705.1 C706.1 C707.1 C708.1 C709.1 C710.1 C721.1 CON203.4 CON701.1 CON701.2 CON701.14 CON702.6 CON703.12 CON703.13 CON703.16 D701.1 L201.1 L202.1 L203.1 R201.2 R202.2 R203.1 R211.1 R704.1 S701.2 S701.3 U201.6 U201.10 U201.16 U201.22 U201.25 U201.33 U201.40 U201.42 U202.6 U701.5 U701.15 U701.23 U701.35 U701.43 X201.2 X201.4 X701.2 X701.4 | length 36.1
  Top Layer w0.2: U201.40@92.615,48.748 92.625,48.758 93.97,48.758 v1(93.98,48.768) ; v1(95.504,50.419) 95.546,50.461 95.546,51.679 U201.33@95.565,51.698 ; U201.25@99.565,51.698 99.574,51.689 v1(100.457,51.689)
  Top Layer w0.203: CON703.12@58.005,41.502 58.005,42.765 cw(c58.039,42.765) v1(58.039,42.799) ; CON703.13@59.255,41.502 59.255,42.745 cw(c59.309,42.745) v1(59.309,42.799) ; U701.15@75.115,49.817 75.115,50.247 cw(c75.819,50.247) 75.156,50.483 cw(c75.819,50.247) 75.321,50.744 75.487,50.91 76.063,51.486 76.251,51.486 v1(76.327,51.562) ; v1(76.708,37.211) 76.712,37.215 76.712,38.463 U701.43@76.715,38.467 ; U701.5@76.84,43.642 77.909,43.642 cw(c77.909,43.365) 78.105,43.561 ccw(c78.633,44.089) 78.633,43.342 U701.5@79.19,43.342 79.208,43.325 80.5,43.325 v1(80.518,43.307) ; CON702.6@82.804,50.546 82.867,50.482 83.757,50.482 v1(83.82,50.419) ; v1(86.106,49.911) C210.1@87.275,49.911 ; v1(86.192,48.26) C202.1@87.361,48.26 ; v1@101.9,54.229 v1(102.108,54.229)
  Top Layer w0.254: CON701.2@60.422,37.749 CON701.1@61.922,37.749 ; U701.23@67.84,48.142 cw(c67.84,46.09) 69.291,47.541 U701.23@70.19,46.642 ; U701.35@70.315,38.467 cw(c71.472,38.467) 70.654,39.285 71.12,39.751 ccw(c70.166,40.705) 71.515,40.705 U701.35@71.515,40.817 ; U701.15@74.515,47.467 74.515,48.126 cw(c75.447,48.126) 74.788,48.785 ; 74.789,48.785 ccw(c73.998,49.575) 75.115,49.575 U701.15@75.115,49.817 ; U701.43@75.515,40.817 75.515,40.558 ccw(c76.118,40.558) 75.58,40.287 cw(c75.353,40.173) 75.591,40.262 ccw(c76.015,40.417) 75.676,40.118 ccw(c76.015,40.417) 75.713,40.081 cw(c75.542,39.894) 75.722,40.073 76.281,39.514 cw(c75.238,38.467) 76.283,39.512 cw(c75.238,38.467) U701.43@76.715,38.467 ; v1(94.869,38.1) 94.869,39.314 C205.1@94.91,39.355 ; v1(96.52,44.577) 96.556,44.541 96.556,43.307 U201.6@96.565,43.298 ; C203.1@97.917,39.355 97.917,38.967 ccw(c98.784,38.967) 98.017,38.562 ccw(c98.784,38.967) v1(98.171,38.354) ; U201.10@98.565,43.298 98.565,42.478 ccw(c99.355,42.478) 98.631,42.162 ccw(c99.355,42.478) v1(98.796,41.92) ; v1(99.568,49.276) 99.587,49.257 101.006,49.257 U201.22@101.015,49.248
  other v1: 41.783,32.258 52.324,32.258 64.262,32.258 71.247,32.258 101.6,32.258 85.471,32.385 108.077,32.385 153.035,32.385 121.666,32.512 140.462,32.512 164.846,32.512 170.815,33.528 68.072,33.655 69.469,33.655 75.311,33.655 76.835,33.655 40.259,33.782 43.18,33.782 62.611,33.782 65.659,33.782 32.512,33.909 39.37,35.941 43.434,36.068 62.611,36.068 66.421,36.068 82.296,36.195 83.693,36.195 159.766,37.084 70.358,37.211 126.873,37.211 68.707,37.338 121.793,37.34 103.251,37.465 116.586,37.592 130.429,37.592 132.842,37.592 61.172,37.749 118.999,37.846 123.317,37.846 79.121,38.1 105.918,39.37 114.046,39.497 32.512,39.751 118.872,39.751 120.396,40.132 121.793,40.134 124.587,40.386 116.332,40.513 151.003,40.513 128.778,40.64 133.35,40.64 138.303,40.64 145.542,40.64 171.196,40.64 89.449,40.678 84.201,40.894 91.186,41.021 154.813,41.656 62.865,41.783 111.633,41.783 100.457,42.418 124.46,42.545 128.778,42.545 133.477,42.545 138.303,42.545 142.113,42.545 145.542,42.545 151.003,42.545 113.919,42.926 120.396,42.926 157.861,42.926 159.385,42.926 118.872,43.307 50.927,43.434 117.094,43.434 89.449,43.472 122.428,43.582 90.678,43.688 100.33,43.942 107.315,43.942 109.474,43.942 143.383,43.942 84.582,44.069 127,44.323 153.289,44.45 155.448,44.45 94.742,44.577 98.298,44.577 114.935,44.958 84.582,45.466 102.362,45.593 32.385,45.974 118.872,45.974 124.714,45.974 109.093,46.101 110.744,46.101 117.094,46.101 65.024,46.355 167.894,46.355 170.307,46.355 122.428,46.376 150.226,46.37 94.742,46.482 153.035,46.482 155.829,46.482 99.187,46.863 91.186,46.99 103.632,46.99 125.603,47.117 128.524,47.117 158.623,47.371 107.188,47.498 109.093,47.498 148.971,47.625 112.141,47.752 114.935,47.752 66.465,48.171 138.176,48.387 144.653,48.514 131.445,48.895 148.971,49.022 103.124,49.403 107.188,49.403 109.22,49.403 112.903,49.784 79.121,49.911 138.176,49.911 167.767,50.165 170.307,50.165 150.226,50.277 32.385,51.054 101.854,51.054 107.061,51.308 125.349,51.308 128.651,51.308 156.083,51.308 109.22,51.435 152.527,51.435 90.043,51.562 105.283,51.943 64.389,52.07 86.36,53.467 95.758,54.229 75.692,54.483 72.136,55.118 77.978,55.118 69.723,55.245 90.805,56.007 115.555,56.149 114.3,57.404 92.583,57.912 32.258,58.674 114.3,58.928 88.1,59.197 105.552,59.324 139.192,59.69 142.748,59.69 115.555,60.183 86.868,60.579 106.807,60.579 98.552,61.722 86.845,61.849 106.807,62.103 139.192,62.357 142.875,62.484 88.1,63.104 58.547,63.119 105.552,63.358 146.312,63.937
  other v3: 72.415,43.042 73.515,43.042 74.615,43.042 72.415,44.142 73.515,44.142 74.615,44.142 72.415,45.242 73.515,45.242 74.615,45.242
MCU_D_PRE_N: R701.2 U701.3 | length 9.1
  Top Layer w0.2: U701.3@76.84,42.642 77.183,42.642 cw(c77.183,41.877) 77.724,42.418 77.841,42.301 ccw(c79.19,43.651) U701.3@79.19,41.742 cw(c79.363,41.742) 79.363,41.915 84.816,41.915 cw(c84.816,41.402) R701.2@85.329,41.402
MCU_D_PRE_P: R702.2 U701.4 | length 9
  Top Layer w0.2: U701.4@76.84,43.142 77.329,43.142 cw(c77.329,42.404) 77.851,42.926 ccw(c78.778,43.853) 78.778,42.542 U701.4@79.19,42.542 ccw(c79.363,42.542) 79.363,42.369 84.899,42.369 ccw(c84.899,42.799) R702.2@85.329,42.799
MISO: CON701.6 CON702.1 CON703.8 U701.11 | length 52
  Top Layer w0.254: v1(53.086,43.18) 53.045,43.139 53.045,41.543 CON703.8@53.005,41.502 ccw(c54.294,41.502) 53.203,40.816 ccw(c54.294,41.502) 53.228,40.778 ccw(c54.294,41.502) 53.382,40.591 53.836,40.137 cw(c52.421,38.723) 54.422,38.723 CON701.6@54.422,37.749 CON701.6@54.61,38.722 ; U701.11@76.84,46.642 77.739,47.541 cw(c79.19,46.09) U701.11@79.19,48.142 79.19,48.27 cw(c80.254,48.27) v1(79.502,49.022) ccw(c78.383,50.141) 79.965,50.141 79.965,50.368 ccw(c79.711,50.367) 79.965,50.38 cw(c80.645,50.419) 79.965,50.458 ccw(c79.711,50.471) 79.965,50.47 79.965,51.384 ccw(c79.711,51.383) 79.965,51.396 cw(c80.645,51.435) 80.601,52.115 ccw(c80.584,52.368) 80.762,52.187 81.444,52.869 ccw(c81.227,53.086) CON702.1@81.534,53.086
  Bottom Layer w0.254: v1(53.086,43.18) cw(c53.902,43.18) 53.902,43.996 61.498,43.996 cw(c61.498,41.456) 63.294,43.252 66.1,40.446 66.669,39.877 cw(c64.95,38.148) 66.675,39.871 ccw(c67.756,40.956) 67.756,39.424 75.184,39.424 ccw(c75.184,42.418) 78.178,42.418 78.178,47.698 cw(c79.502,47.698) v1(79.502,49.022)
MOSI: CON701.7 CON702.4 CON703.7 U701.10 | length 53.5
  Top Layer w0.254: CON703.7@51.755,41.502 51.785,41.472 51.785,40.163 v1(51.816,40.132) ; v1@51.89,40.132 v1(51.816,40.132) ; CON701.7@52.922,37.749 52.922,37.974 ccw(c50.382,37.974) 52.178,39.77 v1(51.816,40.132) ; U701.10@76.84,46.142 77.37,46.142 ccw(c77.369,46.396) 77.483,46.169 ccw(c77.177,46.775) 77.658,46.296 77.768,46.406 cw(c79.19,44.987) 77.853,46.487 ccw(c77.683,46.676) 77.862,46.495 77.959,46.592 cw(c78.138,46.412) 77.978,46.609 78.152,46.783 cw(c79.502,45.433) 79.502,47.342 v1@80.565,47.342 ; v1(80.518,47.371) cw(c81.407,47.371) 81.407,48.26 83.693,48.26 ccw(c83.693,49.657) 85.09,49.657 85.09,50.673 ccw(c83.947,50.673) 83.947,51.816 CON702.4@82.804,51.816
  Bottom Layer w0.254: v1(51.816,40.132) 64.95,40.132 cw(c64.95,38.148) 66.352,39.552 ; 66.353,39.551 ccw(c67.756,40.956) 67.756,38.97 75.184,38.97 ccw(c75.184,42.418) 78.632,42.418 78.632,44.857 ccw(c78.393,44.943) 78.646,44.918 cw(c80.899,44.669) 80.259,46.844 ; 79.834,46.67 cw(c80.899,44.669) 80.259,46.844 ; 80.379,46.922 cw(c80.186,47.087) 80.259,46.844 ; 80.379,46.922 cw(c80.899,46.482) 80.437,46.983 ; 80.438,46.983 ccw(c80.264,47.168) 80.518,47.167 v1(80.518,47.371)
NetC211_2: C211.2 U201.11 X201.1 | length 6.8
  Top Layer w0.2: U201.11@99.065,43.298 99.065,42.774 ccw(c99.543,42.774) 99.084,42.64 ccw(c99.543,42.774) 99.205,42.436 99.45,42.191 cw(c98.858,41.599) 99.695,41.599 99.695,40.274 ccw(c100.345,40.274) 99.885,39.815 99.935,39.765 ccw(c100.795,40.626) 100.104,39.624 ccw(c100.795,40.626) X201.1@100.795,39.409 100.795,37.62 C211.2@100.95,37.465
NetC212_2: C212.2 U201.12 X201.3 | length 6.9
  Top Layer w0.2: U201.12@99.565,43.298 99.565,43.118 99.611,43.072 101.454,43.072 cw(c101.454,42.131) 102.395,42.131 102.395,41.609 102.895,41.109 X201.3@102.995,41.109 103.195,40.909 C212.2@104.902,40.909
NetC701_1: C701.1 U701.42 | length 5
  Top Layer w0.2: U701.42@75.015,40.817 75.015,40.644 ccw(c76.458,40.644) 75.438,39.624 cw(c74.286,38.472) 75.915,38.472 U701.42@75.915,38.467 75.915,37.529 cw(c74.008,37.529) C701.1@75.357,36.18
NetC702_1: C702.1 U701.6 | length 5
  Top Layer w0.254: U701.6@76.84,44.142 U701.6@79.19,44.142 81.662,44.142 C702.1@81.755,44.048